# EAGLE board actuatorBoard (EAGLE 7.7.0)
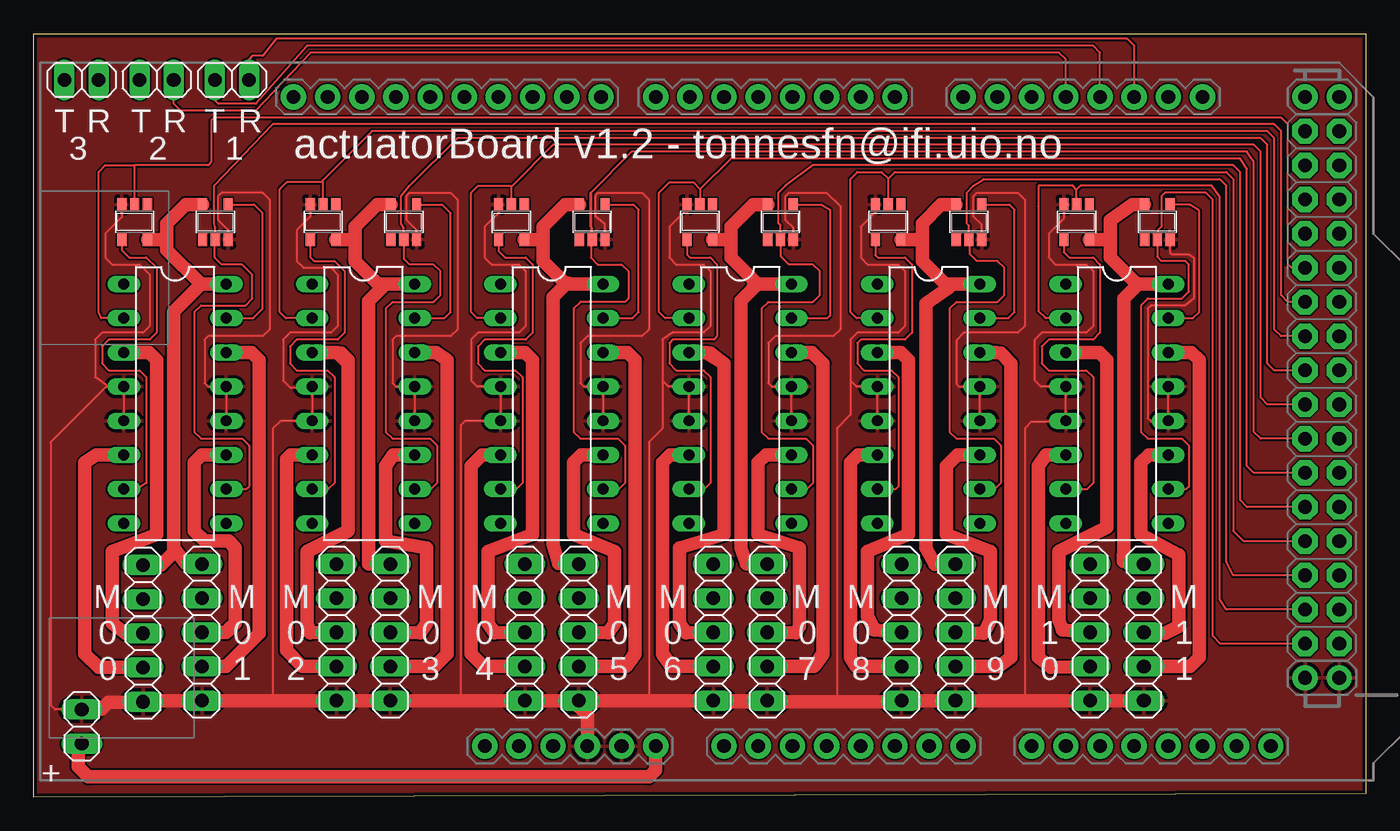
[diagram p0: board, top side]
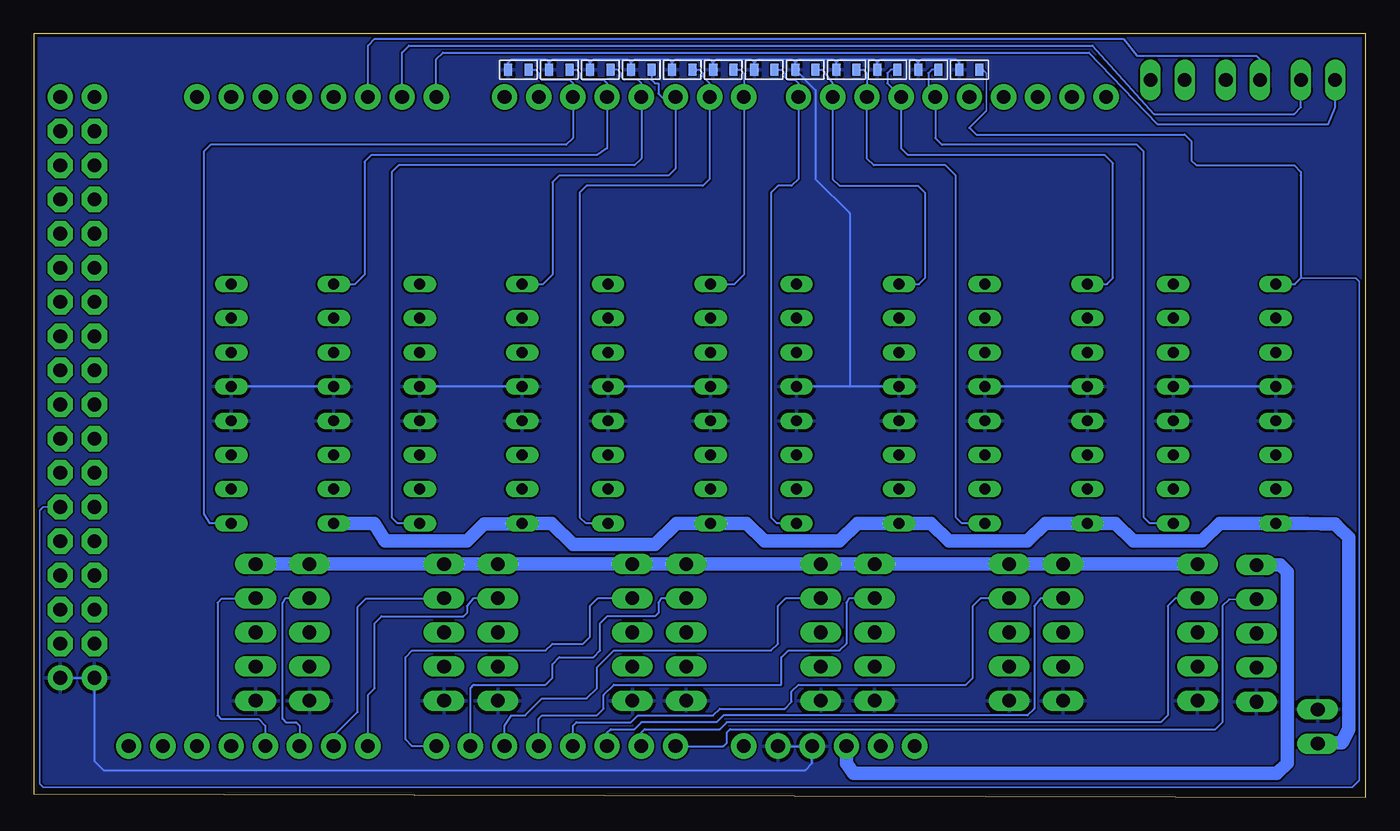
[diagram p1: board, bottom side, seen from below]

Size 99.01 x 56.76 mm. Coordinates in mm from the lower left corner, seen from the top.
Outline: 0,0 0,56.76 99.01,56.76 99.01,0.25 0,0
Copper layers (1*16): Top 0.035mm / dielectric 1.5mm / Bottom 0.035mm
Design rules "MF_Standard_2_Layer": minimum track width 5mil, minimum drill 12mil, track to track 5mil, track to pad 5mil, pad to pad 5mil, via to via 5mil, smd to smd 0mil, copper to edge 10mil, drill to drill 10mil, minimum pad ring 6mil, minimum via ring 6mil, stop-mask expansion 2mil, vias tented up to drill 25mil, thermal gap 10mil

## Footprints (pad centres in the part's own frame; a part is rotated, then mirrored left to right if it is on the bottom)
DIL16 = drill 0.813 long: 1 -8.89,-3.81; 2 -6.35,-3.81; 3 -3.81,-3.81; 4 -1.27,-3.81; 5 1.27,-3.81; 6 3.81,-3.81; 7 6.35,-3.81; 8 8.89,-3.81; 9 8.89,3.81; 10 6.35,3.81; 11 3.81,3.81; 12 1.27,3.81; 13 -1.27,3.81; 14 -3.81,3.81; 15 -6.35,3.81; 16 -8.89,3.81
SOT23-5 = smd 0.69 x 0.99: 1 -0.95,-1.29; 2 0,-1.29; 3 0.95,-1.29; 4 0.95,1.3; 5 -0.95,1.3
1X05 = drill 1.016 long: 1 -5.08,0; 2 -2.54,0; 3 0,0; 4 2.54,0; 5 5.08,0
1X02 = drill 1.016 long: 1 -1.27,0; 2 1.27,0
ARDUINO_MEGA2560 = drill 1.016 pad 1.88: 0 63.5,50.8; 1 60.96,50.8; 2 58.42,50.8; 3 55.88,50.8; 3.3V 35.56,2.54; 4 53.34,50.8; 5 50.8,50.8; 5V 38.1,2.54; 5V. 93.98,50.8; 5V.. 96.52,50.8; 6 48.26,50.8; 7 45.72,50.8; 8 41.656,50.8; 9 39.116,50.8; 10 36.576,50.8; 11 34.036,50.8; 12 31.496,50.8; 13 28.956,50.8; 14 68.58,50.8; 15 71.12,50.8; 16 73.66,50.8; 17 76.2,50.8; 18 78.74,50.8; 19 81.28,50.8; 20 83.82,50.8; 21 86.36,50.8; A0 50.8,2.54; A1 53.34,2.54; A2 55.88,2.54; A3 58.42,2.54; A4 60.96,2.54; A5 63.5,2.54; A6 66.04,2.54; A7 68.58,2.54; A8 73.66,2.54; A9 76.2,2.54; A10 78.74,2.54; A11 81.28,2.54; A12 83.82,2.54; A13 86.36,2.54; A14 88.9,2.54; A15 91.44,2.54; AREF 23.876,50.8; GND 26.416,50.8; GND. 43.18,2.54; GND.. 40.64,2.54; GND... 93.98,7.62; GND.... 96.52,7.62; RESET 33.02,2.54; SCL1 18.796,50.8; SDA1 21.336,50.8; VIN 45.72,2.54 | drill 1.016 pad 1.88 octagon: 22 93.98,48.26; 23 96.52,48.26; 24 93.98,45.72; 25 96.52,45.72; 26 93.98,43.18; 27 96.52,43.18; 28 93.98,40.64; 29 96.52,40.64; 30 93.98,38.1; 31 96.52,38.1; 32 93.98,35.56; 33 96.52,35.56; 34 93.98,33.02; 35 96.52,33.02; 36 93.98,30.48; 37 96.52,30.48; 38 93.98,27.94; 39 96.52,27.94; 40 93.98,25.4; 41 96.52,25.4; 42 93.98,22.86; 43 96.52,22.86; 44 93.98,20.32; 45 96.52,20.32; 46 93.98,17.78; 47 96.52,17.78; 48 93.98,15.24; 49 96.52,15.24; 50 93.98,12.7; 51 96.52,12.7; 52 93.98,10.16; 53 96.52,10.16
R0603 = smd 0.6 x 0.9: P$1 -0.75,0; P$2 0.75,0

## Placement (x,y rotation side)
IC1  SN754410PDIP  [DIL16]  10.51,29.25 270 top
IC2  SN754410PDIP  [DIL16]  24.51,29.25 270 top
IC3  SN754410PDIP  [DIL16]  38.51,29.25 270 top
IC4  SN754410PDIP  [DIL16]  52.51,29.25 270 top
IC5  74AHCT1G04DBV  [SOT23-5]  7.51,42.75 180 top
IC6  74AHCT1G04DBV  [SOT23-5]  13.51,42.75 0 top
IC7  SN754410PDIP  [DIL16]  66.51,29.25 270 top
IC8  SN754410PDIP  [DIL16]  80.51,29.25 270 top
IC9  74AHCT1G04DBV  [SOT23-5]  21.51,42.75 180 top
IC10  74AHCT1G04DBV  [SOT23-5]  27.51,42.75 0 top
IC11  74AHCT1G04DBV  [SOT23-5]  35.51,42.75 180 top
IC12  74AHCT1G04DBV  [SOT23-5]  41.51,42.75 0 top
IC13  74AHCT1G04DBV  [SOT23-5]  49.51,42.75 180 top
IC14  74AHCT1G04DBV  [SOT23-5]  55.51,42.75 0 top
IC15  74AHCT1G04DBV  [SOT23-5]  63.51,42.75 180 top
IC16  74AHCT1G04DBV  [SOT23-5]  69.51,42.75 0 top
IC17  74AHCT1G04DBV  [SOT23-5]  77.51,42.75 180 top
IC18  74AHCT1G04DBV  [SOT23-5]  83.51,42.75 0 top
JP1  [1X05]  8.13,12.18 270 top
JP2  [1X05]  12.51,12.25 270 top
JP3  [1X05]  22.51,12.25 270 top
JP4  [1X05]  26.51,12.25 270 top
JP5  [1X05]  36.51,12.25 270 top
JP6  [1X05]  40.51,12.25 270 top
JP7  [1X05]  50.51,12.25 270 top
JP8  [1X05]  54.51,12.25 270 top
JP9  [1X05]  64.51,12.25 270 top
JP10  [1X05]  68.51,12.25 270 top
JP11  [1X05]  78.51,12.25 270 top
JP12  [1X05]  82.51,12.25 270 top
JP13  [1X02]  3.58,5.25 270 top
JP14  [1X02]  14.73,53.32 0 top
JP15  [1X02]  9.14,53.32 0 top
JP16  [1X02]  3.56,53.32 0 top
PCB1  ARDUINO_MEGA2560  [ARDUINO_MEGA2560]  0.51,1.25 0 top
R1  47k  [R0603]  29.46,54.09 180 bottom
R2  47k  [R0603]  32.51,54.09 0 bottom
R3  47k  [R0603]  35.56,54.09 180 bottom
R4  47k  [R0603]  41.66,54.09 180 bottom
R5  47k  [R0603]  47.75,54.09 180 bottom
R6  47k  [R0603]  53.85,54.09 180 bottom
R7  47k  [R0603]  59.94,54.09 180 bottom
R8  47k  [R0603]  38.61,54.09 0 bottom
R9  47k  [R0603]  44.7,54.09 0 bottom
R10  47k  [R0603]  50.8,54.09 0 bottom
R11  47k  [R0603]  56.9,54.09 0 bottom
R12  47k  [R0603]  62.99,54.09 0 bottom

## Library data of the parts
IC1-IC4 IC7 IC8 = AlexW-Eagle-Libraries
IC5 IC6 IC9-IC18 = 74xx-little-us
JP1-JP16 = pinhead
PCB1 = arduino_mega
R1-R12 = MF_Passives; POPULATE: 1

## Nets
+5V: IC1.16 IC2.16 IC3.16 IC4.16 IC5.5 IC6.5 IC7.16 IC8.16 IC9.5 IC10.5 IC11.5 IC12.5 IC13.5 IC14.5 IC15.5 IC16.5 IC17.5 IC18.5 JP1.1 JP2.1 JP3.1 JP4.1 JP5.1 JP6.1 JP7.1 JP8.1 JP9.1 JP10.1 JP11.1 JP12.1 PCB1.5V
+12V: IC1.8 IC2.8 IC3.8 IC4.8 IC7.8 IC8.8 JP13.2 PCB1.VIN
GND: IC1.4 IC1.5 IC1.12 IC1.13 IC2.4 IC2.5 IC2.12 IC2.13 IC3.4 IC3.5 IC3.12 IC3.13 IC4.4 IC4.5 IC4.12 IC4.13 IC5.3 IC6.3 IC7.4 IC7.5 IC7.12 IC7.13 IC8.4 IC8.5 IC8.12 IC8.13 IC9.3 IC10.3 IC11.3 IC12.3 IC13.3 IC14.3 IC15.3 IC16.3 IC17.3 IC18.3 JP1.5 JP2.5 JP3.5 JP4.5 JP5.5 JP6.5 JP7.5 JP8.5 JP9.5 JP10.5 JP11.5 JP12.5 JP13.1 PCB1.GND. PCB1.GND.. PCB1.GND... PCB1.GND.... R1.P$2 R2.P$1 R3.P$2 R4.P$2 R5.P$2 R6.P$2 R7.P$2 R8.P$1 R9.P$1 R10.P$1 R11.P$1 R12.P$1
MOT01_D: IC1.2 IC5.2 PCB1.30
MOT01_D_I: IC1.7 IC5.4
MOT01_EN: IC1.1 PCB1.45 R1.P$1
MOT01_N: IC1.6 JP1.4
MOT01_P: IC1.3 JP1.3
MOT02_D: IC1.10 IC6.2 PCB1.32
MOT02_D_I: IC1.15 IC6.4
MOT02_EN: IC1.9 PCB1.12 R2.P$2
MOT02_N: IC1.14 JP2.4
MOT02_P: IC1.11 JP2.3
MOT03_D: IC2.2 IC9.2 PCB1.34
MOT03_D_I: IC2.7 IC9.4
MOT03_EN: IC2.1 PCB1.11 R3.P$1
MOT03_N: IC2.6 JP3.4
MOT03_P: IC2.3 JP3.3
MOT04_D: IC2.10 IC10.2 PCB1.36
MOT04_D_I: IC2.15 IC10.4
MOT04_EN: IC2.9 PCB1.10 R8.P$2
MOT04_N: IC2.14 JP4.4
MOT04_P: IC2.11 JP4.3
MOT05_D: IC3.2 IC11.2 PCB1.38
MOT05_D_I: IC3.7 IC11.4
MOT05_EN: IC3.1 PCB1.9 R4.P$1
MOT05_N: IC3.6 JP5.4
MOT05_P: IC3.3 JP5.3
MOT06_D: IC3.10 IC12.2 PCB1.40
MOT06_D_I: IC3.15 IC12.4
MOT06_EN: IC3.9 PCB1.8 R9.P$2
MOT06_N: IC3.14 JP6.4
MOT06_P: IC3.11 JP6.3
MOT07_D: IC4.2 IC13.2 PCB1.42
MOT07_D_I: IC4.7 IC13.4
MOT07_EN: IC4.1 PCB1.7 R5.P$1
MOT07_N: IC4.6 JP7.4
MOT07_P: IC4.3 JP7.3
MOT08_D: IC4.10 IC14.2 PCB1.44
MOT08_D_I: IC4.15 IC14.4
MOT08_EN: IC4.9 PCB1.6 R10.P$2
MOT08_N: IC4.14 JP8.4
MOT08_P: IC4.11 JP8.3
MOT09_D: IC7.2 IC15.2 PCB1.46
MOT09_D_I: IC7.7 IC15.4
MOT09_EN: IC7.1 PCB1.5 R6.P$1
MOT09_N: IC7.6 JP9.4
MOT09_P: IC7.3 JP9.3
MOT10_D: IC7.10 IC16.2 PCB1.48
MOT10_D_I: IC7.15 IC16.4
MOT10_EN: IC7.9 PCB1.4 R11.P$2
MOT10_N: IC7.14 JP10.4
MOT10_P: IC7.11 JP10.3
MOT11_D: IC8.2 IC17.2 PCB1.50
MOT11_D_I: IC8.7 IC17.4
MOT11_EN: IC8.1 PCB1.3 R7.P$1
MOT11_N: IC8.6 JP11.4
MOT11_P: IC8.3 JP11.3
MOT12_D: IC8.10 IC18.2 PCB1.52
MOT12_D_I: IC8.15 IC18.4
MOT12_EN: IC8.9 PCB1.2 R12.P$2
MOT12_N: IC8.14 JP12.4
MOT12_P: IC8.11 JP12.3
N$1: JP15.2 PCB1.17
N$2: JP15.1 PCB1.16
N$3: JP14.1 PCB1.18
N$4: JP14.2 PCB1.19
N$5: JP16.2 PCB1.15
N$6: JP16.1 PCB1.14
POT01: JP1.2 PCB1.A0
POT02: JP2.2 PCB1.A1
POT03: JP3.2 PCB1.A2
POT04: JP4.2 PCB1.A3
POT05: JP5.2 PCB1.A4
POT06: JP6.2 PCB1.A5
POT07: JP7.2 PCB1.A6
POT08: JP8.2 PCB1.A7
POT09: JP9.2 PCB1.A8
POT10: JP10.2 PCB1.A9
POT11: JP11.2 PCB1.A10
POT12: JP12.2 PCB1.A11

## Tracks (layer width: path | path; a pad name or v marks a point on that pad's centre or on a via)
+5V
  Top 1.016: 80.01,41.64 80.01,42.91 81.66,44.05 IC18.5 | 80.01,41.64 80.01,40.12 81.91,38.21 82.06,38.18 82.1,38.14 | IC17.5 79.82,41.45 80.01,41.64 | IC16.5 67.44,44.05 66.04,42.66 66.04,41.39 | IC15.5 65.97,41.45 66.04,41.39 | 66.04,41.39 66.04,39.86 67.76,38.14 IC7.16 68.13,38.14 67.94,37.96 68.01,37.89 66.29,36.69 66.29,18.53 66.99,17.32 JP10.1 | IC14.5 53.47,44.05 51.82,42.4 51.82,41.13 | 51.82,41.13 51.82,40.12 53.79,38.14 | IC13.5 51.49,41.45 51.82,41.13 | 54.1,38.14 IC4.16 54.42,38.14 | 54.1,38.14 53.79,38.14 | 53.5,38.05 54.1,38.14 | IC12.5 39.5,44.05 37.85,42.4 37.85,41.64 | 37.85,41.64 37.85,39.86 39.56,38.14 | IC11.5 37.66,41.45 37.85,41.64 | 40.13,38.14 IC3.16 40.7,38.14 | 40.13,38.14 39.56,38.14 | 39.5,38.27 40.13,38.14 | IC10.5 25.53,44.05 23.88,42.4 23.88,41.64 | 23.88,41.64 23.88,39.86 25.59,38.14 26.16,38.14 | IC9.5 23.69,41.45 23.88,41.64 | 26.16,38.14 IC2.16 27.24,38.14 | IC6.5 11.3,44.05 9.91,42.66 9.91,41.13 | IC5.5 9.58,41.45 9.91,41.13 | 12.45,38.14 IC1.16 13.01,38.14 | IC8.16 82.1,38.14 | JP12.1 80.99,17.54 81.03,18.78 81.03,37.07 82.1,38.14 | JP8.1 52.99,17.35 52.58,18.53 52.58,36.93 53.79,38.14 | JP6.1 38.99,17.38 38.61,18.78 38.61,37.19 39.56,38.14 | 26.16,38.14 24.89,36.87 24.89,17.33 JP4.1 | 12.45,38.14 10.41,36.11 10.41,18.53 10.54,18.37 10.57,18.33 | JP2.1 12.45,17.4 11.29,17.4 10.57,18.33 | 9.91,41.13 9.91,40.68 12.45,38.14 | JP1.1 9.49,17.26 10.57,18.33
  Bottom 1.016: JP12.1 JP11.1 JP10.1 JP9.1 JP8.1 JP7.1 JP6.1 JP5.1 JP4.1 JP3.1 JP2.1 | PCB1.5V 38.61,2.52 38.1,1.76 6.6,1.76 5.84,2.52 5.84,16.75 6.35,17.26 JP1.1
+12V
  Top 1.016: PCB1.VIN 46.23,2.02 45.72,1.51 4.06,1.51 3.3,2.27 3.3,3.96 JP13.2
  Bottom 1.016: IC8.8 73.72,20.36 72.9,19.03 66.8,19.03 65.53,20.3 62.76,20.3 IC7.8 60.51,20.36 58.93,18.78 52.83,18.78 51.25,20.36 IC4.8 46.03,20.36 44.7,19.03 39.12,19.03 37.79,20.36 IC3.8 32.32,20.36 30.99,19.03 25.15,19.03 23.82,20.36 IC2.8 18.6,20.36 17.27,19.03 12.19,19.03 10.86,20.36 IC1.8 4.38,20.36 3.32,20.32 2.29,20.3 2.03,20.07 1.27,19.31 1.27,5.06 1.78,4.05 3.32,4.05 JP13.2
GND
  Top 0.152: IC8.13 IC8.12 84.26,27.92 83.06,27.92 82.8,28.18 82.8,36.31 83.06,36.56 85.6,36.56 86.21,37.07 86.21,40.12 85.85,40.37 84.58,40.37 84.46,40.49 IC18.3 | IC17.3 76.56,43.01 75.44,41.89 75.44,40.12 75.95,39.61 78.23,39.61 78.74,39.1 78.74,35.04 78.23,34.53 74.93,34.53 74.42,34.02 74.42,30.97 74.87,30.52 IC8.4 IC8.5 76.64,27.92 74.17,27.92 73.66,27.42 73.66,7.17 | IC7.5 IC7.4 61.15,30.52 60.71,30.97 | IC4.12 IC4.13 54.86,30.52 54.61,30.78 54.61,33.77 55.12,34.27 59.44,34.27 59.94,34.78 59.94,43.93 58.93,44.94 56.13,44.94 55.88,44.69 55.88,42.91 56.46,42.33 IC14.3 | IC4.5 IC4.4 47.18,30.52 46.74,30.97 | IC3.12 IC3.13 40.89,30.52 40.64,30.78 40.64,33.77 41.15,34.27 45.21,34.27 45.72,34.78 45.72,44.43 45.21,44.94 41.91,44.94 41.76,44.69 41.76,43.16 42.46,42.62 IC12.3 | IC2.12 IC2.13 26.92,30.52 26.67,30.78 26.67,34.02 26.92,34.27 30.99,34.27 31.5,34.78 31.5,44.43 30.99,44.94 27.94,44.94 27.71,44.69 27.71,42.91 28.46,42.14 IC10.3 | IC1.12 IC1.13 12.95,30.52 12.7,30.78 12.7,34.02 12.95,34.27 17.02,34.27 17.53,34.78 17.53,44.43 17.02,44.94 13.97,44.94 13.72,44.69 13.72,42.91 14.46,42.17 IC6.3 | IC1.5 IC1.4 5.53,30.52 | IC7.12 IC7.13 68.77,30.52 68.58,30.72 68.58,33.96 69.15,34.53 73.15,34.53 73.66,35.04 73.66,44.43 73.15,44.94 70.1,44.94 69.85,44.69 69.85,43.16 70.46,42.56 IC16.3 | 60.71,30.97 60.71,34.02 61.21,34.53 64.26,34.53 64.77,35.04 64.77,39.1 64.26,39.61 61.98,39.61 61.47,40.12 61.47,42.4 62.56,43.49 IC15.3 | 46.74,30.97 46.74,34.02 47.5,34.53 49.78,34.53 50.29,35.04 50.29,39.1 49.78,39.61 47.75,39.61 47.24,40.12 47.24,42.4 48.56,43.72 IC13.3
  Top 0.152: 5.53,30.52 4.57,31.23 4.57,34.02 5.08,34.53 8.13,34.53 8.64,35.04 8.64,38.85 7.87,39.61 5.84,39.61 5.33,40.12 5.33,41.89 6.56,43.12 IC5.3 | 5.53,30.52 5.39,30.52 1.27,26.4 1.27,6.84 1.59,6.52 JP13.1 | IC9.3 20.56,43.15 19.56,42.15 19.56,39.86 20.07,39.35 22.1,39.35 22.61,38.85 22.61,35.04 22.1,34.53 19.05,34.53 18.54,34.02 18.54,30.97 19.05,30.46 20.64,30.46 IC2.4 IC2.5 18.35,27.98 17.78,27.42 17.78,7.43 17.53,7.17 | IC11.3 34.56,43.43 33.53,42.4 33.53,40.12 34.04,39.61 36.07,39.61 36.58,39.1 36.58,35.04 36.07,34.53 33.02,34.53 32.51,34.02 32.51,30.97 32.96,30.52 IC3.4 IC3.5 32.06,27.98 31.75,27.67 31.75,7.17 | 46.74,30.97 46.74,27.42 45.72,26.4 45.72,7.43 45.97,7.17 | 60.71,30.97 60.71,28.43 59.69,27.42 59.69,7.1
  Top 1.016: JP6.5 JP5.5 31.75,7.17 JP4.5 JP3.5 17.53,7.17 JP2.5 8.46,7.17 | JP8.5 JP7.5 | JP6.5 40.01,7.22 41.15,6.08 PCB1.GND.. | JP7.5 45.97,7.17 JP6.5 | JP12.5 JP11.5 73.66,7.17 JP10.5 JP9.5 64.43,7.1 59.69,7.1 50.59,7.1 JP7.5 | 8.38,7.05 5.54,7.05 5.01,6.52 JP13.1
  Bottom 0.152: IC8.4 IC8.13 | PCB1.GND.... PCB1.GND... 94.49,2.69 93.81,2.02 41.66,2.02 41.15,2.52 PCB1.GND.. PCB1.GND. | IC1.13 IC1.4 6.64,30.46 | IC2.4 IC2.13 | IC3.4 38.35,30.52 | 38.35,30.52 IC3.13 | IC4.4 IC4.13 | IC7.4 IC7.13 | R1.P$2 30.21,54.58 30.48,54.85 33.02,54.85 33.27,54.59 | 33.27,54.59 33.27,54.1 R2.P$1 | R3.P$2 36.31,54.61 | 36.31,54.61 36.07,54.85 33.53,54.85 33.27,54.59 | R8.P$1 39.36,54.61 | 39.36,54.61 39.12,54.85 36.55,54.85 36.31,54.61 | 42.41,54.61 R4.P$2 40.89,52.56 40.89,45.96 38.35,43.42 38.35,30.52 | 42.41,54.61 42.16,54.85 39.6,54.85 39.36,54.61 | 42.41,54.61 42.65,54.85 45.21,54.85 45.45,54.61 | R9.P$1 45.45,54.61 | R5.P$2 48.5,54.61 | 48.5,54.61 48.26,54.85 45.7,54.85 45.45,54.61 | 48.5,54.61 48.74,54.85 51.31,54.85 51.55,54.61 | R10.P$1 51.55,54.61 | 51.55,54.61 51.79,54.85 54.36,54.85 54.6,54.61 | R6.P$2 54.6,54.61 | R11.P$1 57.65,54.61 | 57.65,54.61 57.4,54.85 54.84,54.85 54.6,54.61 | R7.P$2 60.69,54.61 | 60.69,54.61 60.45,54.85 57.89,54.85 57.65,54.61 | R12.P$1 63.74,54.61 63.5,54.85 60.94,54.85 60.69,54.61
  pour Top: -0.25,56.88 -0.25,-0.52 100.08,-0.52 100.08,56.88
  pour Bottom: -0.51,57.13 -0.51,-0.78 100.33,-0.78 100.33,57.13
MOT01_D
  Top 0.152: PCB1.30 93.47,39.35 93.22,39.61 93.22,50.02 92.71,50.53 13.46,50.53 13.21,50.28 13.21,47.23 12.95,46.97 7.51,46.97 | IC5.2 7.51,46.97 | IC1.2 5.02,35.6 4.83,36.05 4.83,46.47 5.33,46.97 7.51,46.97
MOT01_D_I
  Top 0.152: IC5.4 6.56,40.67 7.11,40.12 8.38,40.12 9.14,39.35 9.14,34.53 8.64,34.02 5.59,34.02 5.08,33.51 5.08,32.24 5.59,31.73 7.87,31.73 8.38,31.23 8.38,23.35 7.68,22.9 IC1.7
MOT01_EN
  Bottom 0.127: 29.46,49.77 28.19,51.04 28.19,53.83 28.45,54.09 R1.P$1 | PCB1.45 98.3,21.57 98.55,21.32 98.55,1 98.3,0.75 1.02,0.75 0.51,1.25 0.51,38.34 0.76,38.59 4.83,38.59
  Bottom 0.152: 29.46,49.77 28.96,49.26 13.46,49.26 12.95,48.75 12.95,47.33 12.59,46.97 5.33,46.97 4.83,46.47 4.83,45.96 | 4.83,45.96 4.83,38.59 5.27,38.14 IC1.1 | 4.84,46.22 4.83,45.96
MOT01_N
  Top 1.016: IC1.6 4.63,25.44 3.81,24.88 3.81,10.65 4.83,9.64 JP1.4
MOT01_P
  Top 1.016: IC1.3 8.58,33.06 9.14,32.5 9.14,19.54 5.84,18.27 5.84,12.94 6.86,12.18 JP1.3
MOT02_D
  Top 0.152: PCB1.32 93.22,36.81 92.71,37.32 92.71,49.51 92.2,50.02 17.78,50.02 13.41,45.45 13.41,42.66 13.51,42.36 IC6.2 13.46,41.42 13.46,40.12 13.97,39.61 15.49,39.61 16.26,38.85 16.26,37.07 15.75,36.56 12.45,36.56 11.94,36.05 11.94,27.16 12.45,26.65 15.49,26.65 16,26.15 16,23.1 15.81,22.9 IC1.10
MOT02_D_I
  Top 0.152: IC6.4 16.38,44.05 17.02,43.42 17.02,36.31 16.32,35.6 IC1.15
MOT02_EN
  Bottom 0.152: IC1.9 16.06,20.36 16.51,20.81 16.51,45.96 | 16.51,45.96 16.51,47.99 17.02,48.5 31.5,48.5 32,49.01 PCB1.12 32.51,52.56 32.51,53.83 32.26,54.09 R2.P$2 | 16.52,45.97 16.51,45.96
MOT02_N
  Top 1.016: JP2.4 14.3,9.71 16.76,12.18 16.76,32.5 16.2,33.06 IC1.14
MOT02_P
  Top 1.016: IC1.11 12.51,25.44 11.94,24.88 11.94,19.8 12.7,19.03 14.48,19.03 14.99,18.53 14.99,12.94 14.86,12.81 14.73,12.68 14.3,12.25 JP2.3
MOT03_D
  Top 0.152: PCB1.34 92.71,34.27 92.2,34.78 92.2,49.01 91.69,49.51 25.15,49.51 21.51,45.88 21.51,45.7 | IC9.2 21.51,45.7 | IC2.2 18.74,35.6 18.29,36.05 18.29,45.2 18.8,45.7 21.51,45.7
MOT03_D_I
  Top 0.152: IC9.4 20.56,40.13 20.83,39.86 22.35,39.86 23.11,39.1 23.11,34.53 22.61,34.02 19.56,34.02 19.05,33.51 19.05,32.24 19.56,31.73 21.84,31.73 22.35,31.23 22.35,23.35 21.9,22.9 IC2.7
MOT03_EN
  Bottom 0.152: IC2.1 19.24,38.14 18.8,38.59 18.8,47.12 19.41,47.74 34.04,47.74 34.54,48.24 PCB1.11 35.56,53.07 35.56,53.83 35.31,54.09 R3.P$1
MOT03_N
  Top 1.016: JP3.4 19.97,9.73 18.8,10.91 18.8,25.13 19.11,25.44 IC2.6
MOT03_P
  Top 1.016: JP3.3 20.54,12.21 20.32,12.94 20.32,18.27 23.37,19.8 23.37,32.24 | 23.37,32.24 23.37,32.5 22.86,33 | IC2.3 22.55,33.06 23.37,32.24
MOT04_D
  Top 0.152: PCB1.36 92.2,31.73 91.69,32.24 91.69,48.5 91.19,49.01 31.5,49.01 27.94,45.45 27.31,44.69 27.31,42.66 27.51,42.33 IC10.2 27.51,40.04 27.94,39.61 29.72,39.61 30.23,39.1 30.23,37.32 29.72,36.81 26.67,36.81 26.16,36.31 26.16,27.16 26.67,26.65 29.46,26.65 29.97,26.15 29.97,23.35 29.52,22.9 IC2.10
MOT04_D_I
  Top 0.152: IC2.15 30.54,35.6 30.99,36.05 30.99,43.42 30.35,44.05 IC10.4
MOT04_EN
  Bottom 0.152: IC2.9 30.03,20.36 30.48,20.81 30.48,46.21 31.24,46.97 36.58,46.97 37.08,47.48 PCB1.10 37.08,53.83 37.34,54.09 R8.P$2
MOT04_N
  Top 1.016: IC2.14 29.91,33.06 30.73,32.5 30.73,10.65 29.81,9.73 29.56,9.73 JP4.4
MOT04_P
  Top 1.016: JP4.3 28.73,12.21 29.21,12.94 29.21,18.53 26.16,19.03 26.16,24.62 26.73,25.44 IC2.11
MOT05_D
  Top 0.152: PCB1.38 91.69,29.19 91.19,29.7 91.19,47.99 90.68,48.5 38.61,48.5 35.51,45.4 | IC11.2 35.51,45.4 | IC3.2 32.96,35.6 32.51,36.05 32.51,44.94 33.02,45.45 35.46,45.45 35.51,45.4
MOT05_D_I
  Top 0.152: IC11.4 34.56,40.61 35.05,40.12 36.58,40.12 37.08,39.61 37.08,34.53 36.58,34.02 33.53,34.02 33.02,33.51 33.02,32.24 33.53,31.73 35.81,31.73 36.32,31.23 36.32,23.35 35.87,22.9 IC3.7
MOT05_EN
  Bottom 0.152: IC3.1 33.21,38.14 32.77,38.59 32.77,44.94 33.27,45.45 39.12,45.45 39.62,45.96 PCB1.9 39.62,53.07 40.39,54.09 R4.P$1
MOT05_N
  Top 1.016: JP5.4 33.43,9.73 32.51,10.65 32.51,24.62 33.33,25.44 IC3.6
MOT05_P
  Top 1.016: JP5.3 34.26,12.21 33.78,12.94 33.78,18.27 37.08,19.54 37.08,32.5 36.52,33.06 IC3.3
MOT06_D
  Top 0.152: PCB1.40 91.19,26.65 90.68,27.16 90.68,47.23 90.17,47.99 44.45,47.99 41.41,44.95 | IC12.2 41.51,42.3 41.4,42.4 41.4,44.95 41.41,44.95 | 41.41,44.95 41.41,40.1 41.91,39.61 43.69,39.61 44.2,39.1 44.2,37.07 43.94,36.81 40.64,36.81 40.13,36.31 40.13,27.16 40.64,26.65 43.43,26.65 43.94,26.15 43.94,23.35 43.49,22.9 IC3.10
MOT06_D_I
  Top 0.152: IC3.15 44.51,35.6 44.96,36.05 44.96,43.67 44.58,44.05 IC12.4
MOT06_EN
  Bottom 0.152: IC3.9 43.75,20.36 44.2,20.81 44.2,44.94 43.69,45.45 42.67,45.45 42.16,45.96 PCB1.8 42.16,53.07 42.42,53.32 42.93,53.32 43.18,53.58 43.18,53.83 43.43,54.09 R9.P$2
MOT06_N
  Top 1.016: JP6.4 44.04,9.73 44.7,10.65 44.7,32.5 44.14,33.06 IC3.14
MOT06_P
  Top 1.016: JP6.3 42.7,12.21 43.18,12.94 43.18,18.27 40.13,19.54 40.13,24.88 40.7,25.44 IC3.11
MOT07_D
  Top 0.152: PCB1.42 90.68,24.11 90.17,24.62 90.17,46.72 89.66,47.48 51.82,47.48 49.53,45.2 | IC4.2 46.93,35.6 46.48,36.05 46.48,44.94 47.24,45.7 49.02,45.7 49.53,45.2 | 49.53,45.2 49.53,44.07 IC13.2
MOT07_D_I
  Top 0.152: IC13.4 48.56,40.33 48.77,40.12 50.29,40.12 50.8,39.61 50.8,34.27 50.55,34.02 47.5,34.02 47.24,33.77 47.24,32.24 47.75,31.73 49.78,31.73 50.29,31.23 50.29,23.35 49.84,22.9 IC4.7
MOT07_EN
  Bottom 0.152: IC4.1 46.93,38.14 46.23,38.85 PCB1.7 46.23,53.83 46.48,54.09 R5.P$1
MOT07_N
  Top 1.016: JP7.4 47.4,9.73 46.74,10.65 46.74,24.88 47.3,25.44 IC4.6
MOT07_P
  Top 1.016: JP7.3 48.48,12.21 48.01,12.94 48.01,18.53 51.31,19.54 51.31,32.24 | 51.31,32.24 50.29,33 | IC4.3 49.98,33.06 51.31,32.24
MOT08_D
  Top 0.152: PCB1.44 90.17,21.57 89.66,22.08 89.66,46.47 89.15,46.97 57.91,46.97 55.88,45.45 55.37,44.94 55.37,42.66 55.51,42.52 IC14.2 55.51,40.23 56.13,39.61 57.91,39.61 58.42,39.1 58.42,37.32 57.91,36.81 54.61,36.81 54.1,36.31 54.1,27.16 54.61,26.65 57.4,26.65 57.91,26.15 57.91,23.35 57.46,22.9 IC4.10
MOT08_D_I
  Top 0.152: IC14.4 58.55,44.05 59.18,43.67 59.18,35.8 58.99,35.6 IC4.15
MOT08_EN
  Bottom 0.152: IC4.9 57.97,20.36 58.42,20.81 58.42,44.94 57.91,45.45 49.28,45.45 48.77,45.96 PCB1.6 48.77,53.07 49.28,53.58 49.28,53.83 49.53,54.09 R10.P$2
MOT08_N
  Top 1.016: JP8.4 58.01,9.73 58.67,10.65 58.67,32.24 57.85,33.06 IC4.14
MOT08_P
  Top 1.016: JP8.3 56.67,12.21 56.9,12.68 56.9,18.53 53.85,19.54 53.85,24.88 54.42,25.44 IC4.11
MOT09_D
  Top 0.152: IC15.2 63.51,45.97 | 63.51,45.97 64.01,46.47 88.65,46.47 89.15,45.96 89.15,19.8 89.92,19.03 PCB1.46 | IC7.2 61.15,35.6 60.71,36.05 60.71,45.96 61.21,46.47 63.01,46.47 63.51,45.97
MOT09_D_I
  Top 0.152: IC15.4 62.56,40.3 62.74,40.12 64.77,40.12 65.28,39.61 65.28,34.53 64.77,34.02 61.47,34.02 61.21,33.77 61.21,32.24 61.72,31.73 63.75,31.73 64.26,31.23 64.26,23.1 64.07,22.9 IC7.7
MOT09_EN
  Bottom 0.152: IC7.1 61.15,38.14 60.45,38.85 60.45,45.7 59.94,46.21 51.82,46.21 51.31,46.72 PCB1.5 52.32,52.05 52.58,52.31 52.58,53.07 52.83,53.07 53.1,53.34 R6.P$1
MOT09_N
  Top 1.016: JP9.4 61.12,9.73 60.71,10.4 60.71,24.88 61.27,25.44 IC7.6
MOT09_P
  Top 1.016: IC7.3 64.46,33.06 65.02,32.5 65.02,19.54 61.98,18.27 61.98,13.45 62.44,12.43 JP9.3
MOT10_D
  Top 0.152: PCB1.48 89.15,16.49 88.65,17.51 88.65,45.45 88.14,45.96 70.61,45.96 69.85,45.45 69.34,44.94 69.34,42.66 69.51,42.49 IC16.2 69.6,41.38 69.6,40.37 70.1,39.86 71.63,39.86 72.14,39.35 72.14,37.32 71.63,36.81 68.58,36.81 68.07,36.31 68.07,27.16 68.58,26.65 71.37,26.65 71.88,26.15 71.88,23.35 71.43,22.9 IC7.10
MOT10_D_I
  Top 0.152: IC7.15 72.45,35.6 72.9,36.05 72.9,43.67 72.52,44.05 IC16.4
MOT10_EN
  Bottom 0.152: IC7.9 71.94,20.36 72.39,20.81 72.39,46.47 71.88,46.97 54.36,46.97 53.85,47.48 PCB1.4 53.85,53.07 54.1,53.32 55.12,53.32 55.37,53.58 55.37,53.83 55.63,54.09 R11.P$2
MOT10_N
  Top 1.016: JP10.4 71.72,9.73 72.64,10.4 72.64,32.24 71.88,33 71.57,33.06 IC7.14
MOT10_P
  Top 1.016: JP10.3 70.58,12.18 70.87,12.68 71.12,13.19 71.12,18.27 67.82,19.54 67.82,24.62 68.64,25.44 IC7.11
MOT11_D
  Top 0.152: PCB1.50 88.65,13.95 88.14,14.72 88.14,44.63 87.57,45.45 77.8,45.45 77.51,45.16 | IC17.2 77.51,45.16 | 77.51,45.16 77.22,45.45 74.68,45.45 74.66,43.94 74.66,36.14 75.19,35.65 75.23,35.6 IC8.2
MOT11_D_I
  Top 0.152: IC17.4 76.56,40.52 76.96,40.12 78.74,40.12 79.25,39.61 79.25,34.53 78.74,34.02 75.44,34.02 74.93,33.51 74.93,32.24 75.44,31.73 78.23,31.73 78.74,31.23 78.74,23.35 78.29,22.9 IC8.7
MOT11_EN
  Bottom 0.152: IC8.1 75.12,38.14 74.42,38.85 74.42,47.23 73.91,47.74 57.15,47.74 56.39,48.24 PCB1.3 56.39,53.07 56.64,53.32 58.17,53.32 58.42,53.58 58.42,53.83 58.67,54.09 R7.P$1
MOT11_N
  Top 1.016: JP11.4 75.61,9.64 74.68,10.4 74.68,24.62 75.24,25.44 IC8.6
MOT11_P
  Top 1.016: IC8.3 79.19,33.06 79.76,32.5 79.76,20.05 76.2,18.27 76.2,13.19 76.44,12.43 JP11.3
MOT12_D
  Top 0.152: PCB1.52 88.2,11.41 87.63,11.98 87.63,44.43 87.12,44.94 84.07,44.94 83.82,44.69 83.82,42.4 83.57,42.15 83.57,41.52 IC18.2 83.51,40.17 83.82,39.86 85.6,39.86 85.85,39.61 85.85,37.58 85.34,37.07 82.8,37.07 82.3,36.56 82.3,27.16 82.8,26.65 85.34,26.65 85.85,26.15 85.85,23.1 85.66,22.9 IC8.10
MOT12_D_I
  Top 0.152: IC18.4 85.91,44.05 86.61,43.6 86.61,36.05 86.17,35.6 IC8.15
MOT12_EN
  Bottom 0.152: IC8.9 85.91,20.36 86.36,21.07 86.36,47.99 85.85,48.5 59.44,48.5 58.93,49.01 PCB1.2 58.93,53.07 59.18,53.32 61.21,53.32 61.47,53.58 61.47,53.83 61.72,54.09 R12.P$2
MOT12_N
  Top 1.016: IC8.14 86.05,33.06 86.61,32.5 86.61,10.4 85.95,9.73 JP12.4
MOT12_P
  Top 1.016: JP12.3 84.07,12.18 85.09,12.68 85.09,18.02 82.3,19.54 82.3,24.88 82.86,25.44 IC8.11
N$1
  Top 0.152: PCB1.17 76.71,54.85 76.2,55.36 20.57,55.36 16.51,51.04 10.92,51.04 10.41,51.55 JP15.2
N$2
  Bottom 0.152: PCB1.16 74.17,55.86 73.66,56.37 18.03,56.37 17.02,55.1 8.13,55.1 7.87,54.85 JP15.1
N$3
  Top 0.152: PCB1.18 79.25,55.36 78.74,55.86 20.32,55.86 16.51,51.55 13.72,51.55 13.46,51.8 JP14.1
N$4
  Top 0.152: PCB1.19 81.79,55.86 81.28,56.37 18.03,56.37 17.02,55.1 16.26,55.1 16,54.85 JP14.2
N$5
  Bottom 0.152: PCB1.15 71.63,55.36 71.12,55.86 20.32,55.86 15.75,50.78 5.33,50.78 4.83,51.29 JP16.2
N$6
  Bottom 0.152: PCB1.14 69.09,54.85 68.58,55.36 20.57,55.36 15.49,50.02 2.79,50.02 2.29,51.29 JP16.1
POT01
  Bottom 0.127: JP1.2 10.16,14.72
  Bottom 0.152: PCB1.A0 47.75,3.79 47.5,4.05 47.5,4.81 47.24,5.06 11.18,5.06 10.67,5.57 10.67,14.21 10.16,14.72
POT02
  Bottom 0.152: PCB1.A1 53.85,4.81 53.59,5.06 48.01,5.06 47.5,5.57 15.24,5.57 14.73,6.08 14.73,14.21 14.15,14.79 JP2.2
POT03
  Bottom 0.152: PCB1.A2 56.39,4.81 56.13,5.06 54.36,5.06 53.85,5.57 48.26,5.57 47.75,6.08 25.15,6.08 24.64,6.59 24.64,14.21 24.19,14.78 JP3.2
POT04
  Bottom 0.152: PCB1.A3 58.93,5.32 58.67,5.57 54.61,5.57 54.1,6.08 48.51,6.08 48.01,6.59 43.18,6.59 42.67,7.1 42.67,7.86 42.16,8.37 29.72,8.37 29.21,8.87 29.21,14.21 28.64,14.78 JP4.2
POT05
  Bottom 0.152: PCB1.A4 61.47,5.83 61.21,6.08 57.15,6.08 56.64,6.59 56.64,7.6 55.88,8.37 43.43,8.37 43.43,10.4 42.93,10.91 39.12,10.91 38.61,11.41 38.61,14.46 38.42,14.78 JP5.2
POT06
  Bottom 0.152: PCB1.A5 64.01,5.32 63.5,6.08 62.48,6.08 61.21,7.35 57.91,7.35 57.15,8.11 57.15,9.64 55.88,10.91 44.2,10.91 43.69,11.41 43.69,14.21 43.12,14.78 JP6.2
POT07
  Bottom 0.152: PCB1.A6 66.55,8.11 66.29,8.37 60.96,8.37 60.45,8.87 60.45,9.89 59.94,10.4 57.4,10.4 56.9,10.91 56.9,12.94 56.39,13.45 52.83,13.45 52.58,13.7 52.58,14.46 52.39,14.78 JP7.2
POT08
  Bottom 0.152: PCB1.A7 70.87,3.79 71.37,4.3 71.37,10.4 70.87,10.91 60.96,10.91 60.45,11.41 58.17,11.41 57.66,11.92 57.66,14.21 57.09,14.78 JP8.2
POT09
  Bottom 0.152: PCB1.A8 74.17,7.6 73.66,8.11 73.66,12.94 73.15,13.45 67.06,13.45 66.8,13.7 66.8,14.21 66.36,14.78 JP9.2
POT10
  Bottom 0.152: PCB1.A9 76.71,4.56 74.93,6.33 74.93,14.15 74.31,14.78 JP10.2
POT11
  Bottom 0.152: JP11.2 80.33,14.78 80.52,14.46 80.52,5.83 80.26,5.57 79.5,5.57 79.25,5.32 PCB1.A10
POT12
  Bottom 0.152: PCB1.A11 81.79,5.32 82.3,5.83 85.09,5.83 85.34,6.08 85.34,14.46 85.03,14.78 JP12.2

## Text on the board
tPlace: T | R | T | R | T | R | 3 | 2 | 1 | actuatorBoard v1.2 - tonnesfn@ifi.uio.no | +
tNames: M / 0 / 0 | M / 0 / 1 | M / 0 / 2 | M / 0 / 3 | M / 0 / 4 | M / 0 / 5 | M / 0 / 6 | M / 0 / 7 | M / 0 / 8 | M / 0 / 9 | M / 1 / 0 | M / 1 / 1